# Altium PCB PCB1.PcbDoc
Units mil, origin at the board's own origin, x right, y up, seen from the top; angles counter-clockwise.
Board outline 1880 x 1065 mil, 2 copper layers (Top Layer, Bottom Layer); 16 components, 8 nets, 37 pads, 38 vias.
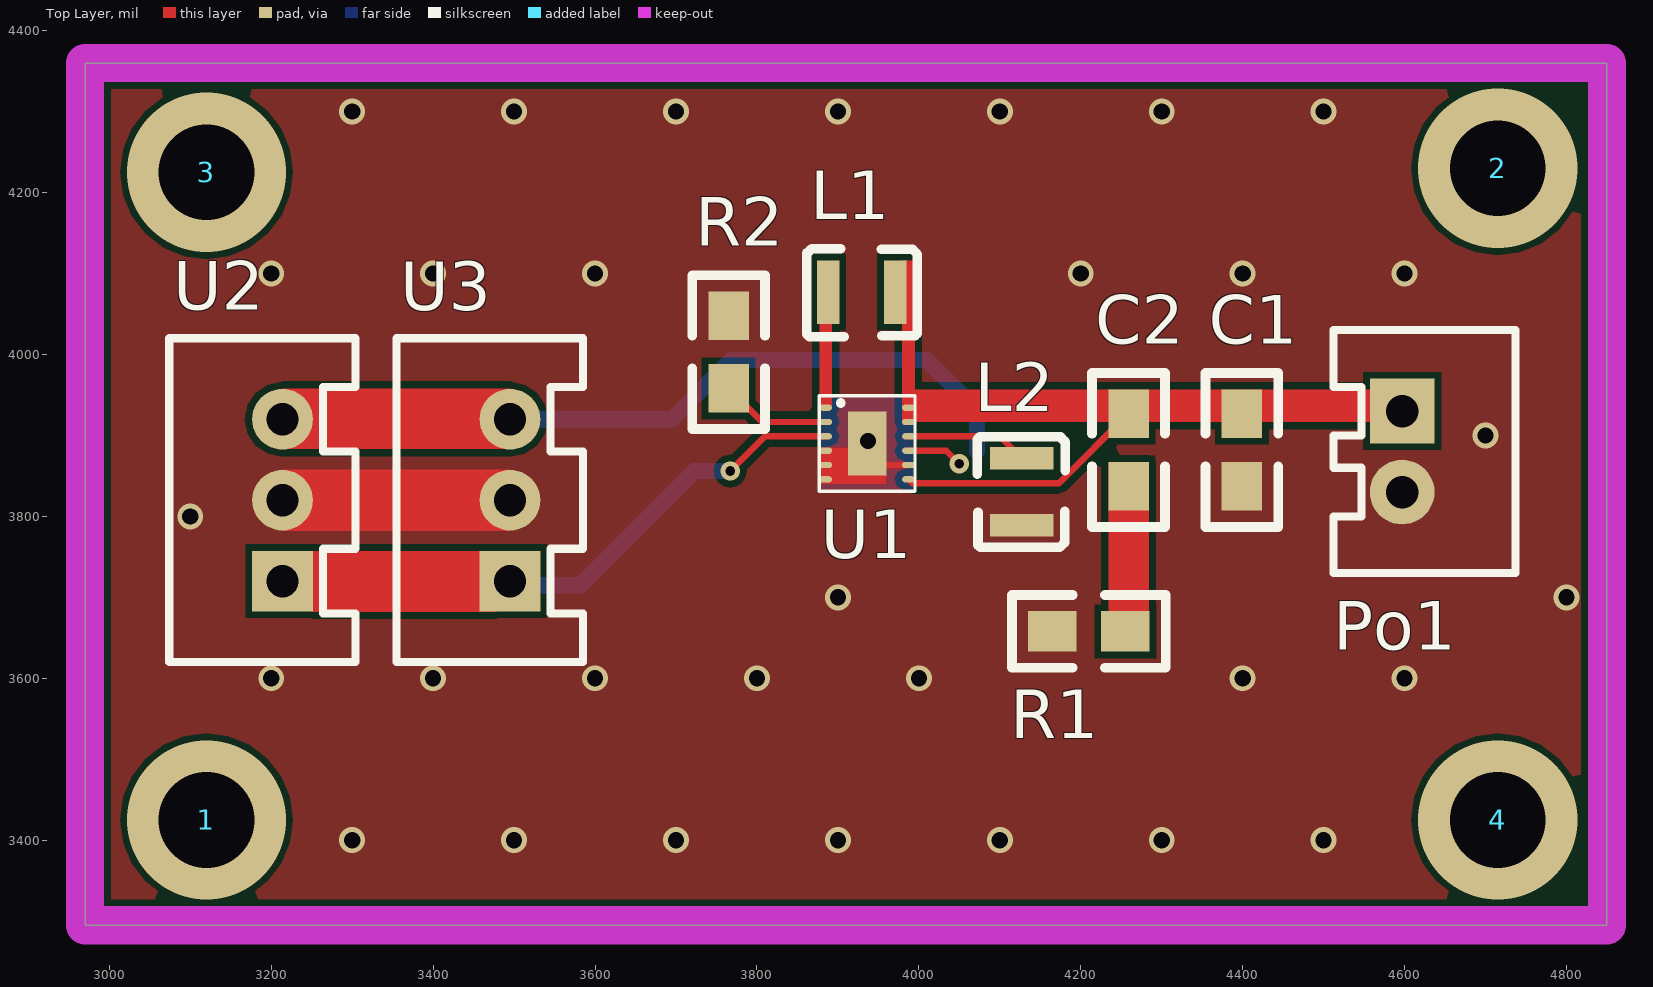
[diagram p0: Top Layer view]
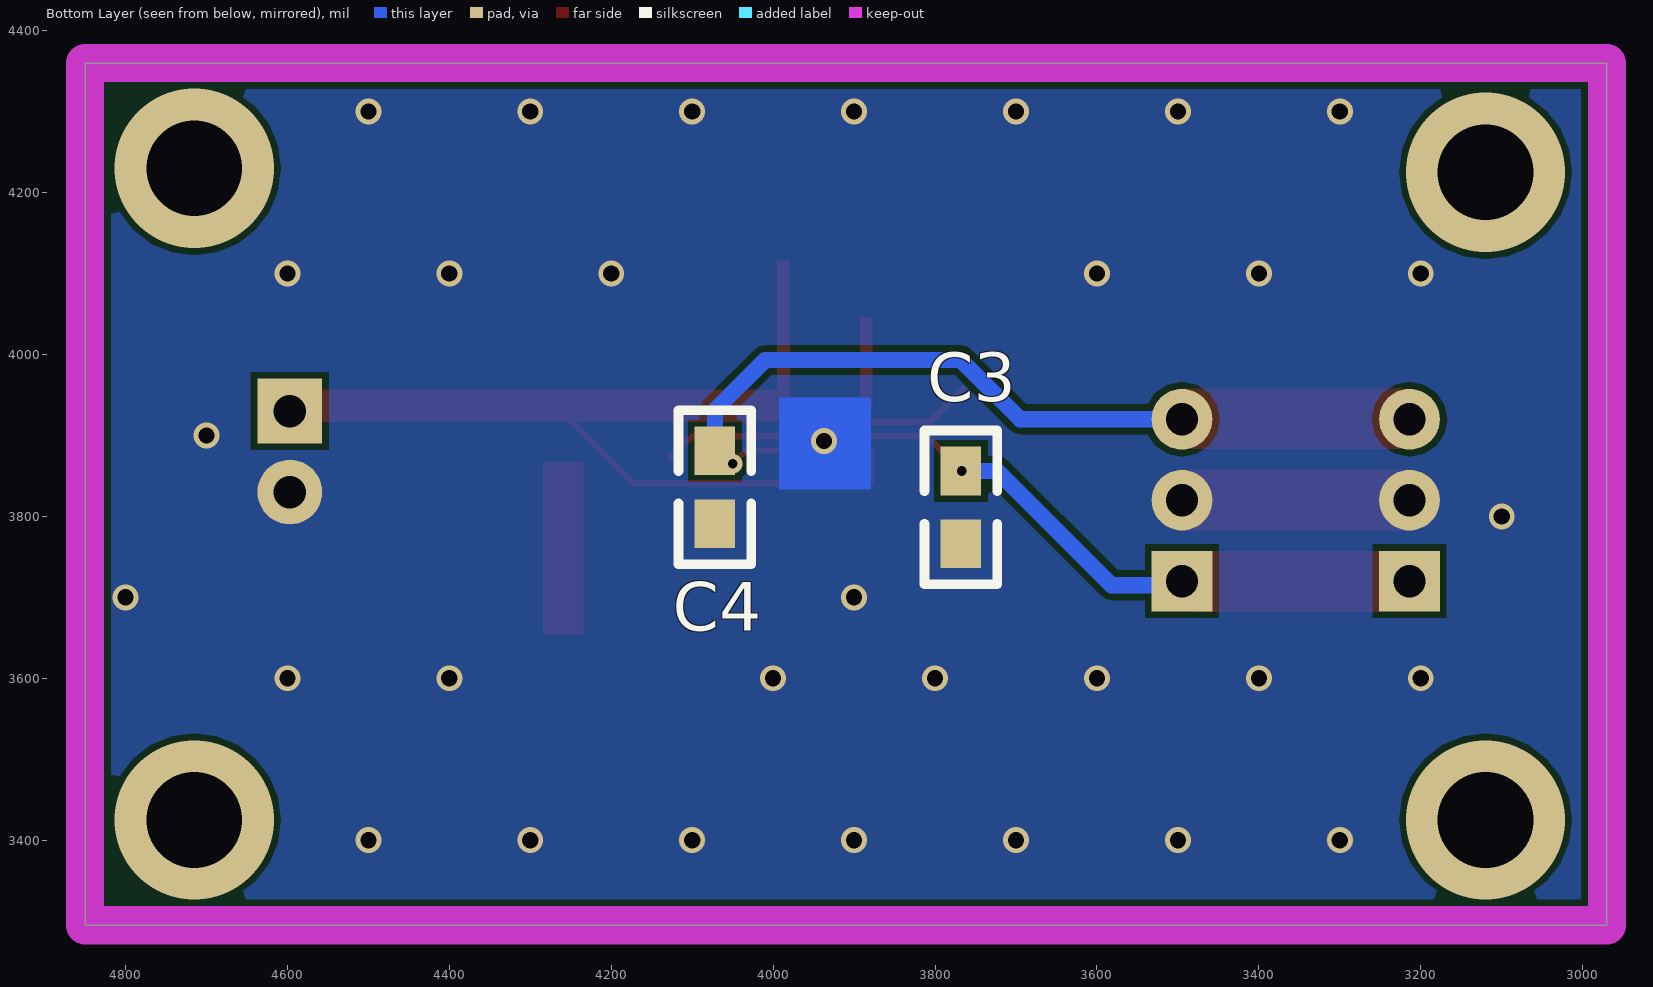
[diagram p1: Bottom Layer view, seen from below]

## Layer stack, top to bottom
Top Solder: solder mask 0.4, Solder Resist, Dk 3.5
Top Layer: signal copper 1.4
Dielectric 1: dielectric 12.6, FR-4, Dk 4.8
Bottom Layer: signal copper 1.4
Bottom Solder: solder mask 0.4, Solder Resist, Dk 3.5

## Board outline
2970,3295 4850,3295 4850,4360 2970,4360

## Design rules (kind name [scope] priority, off if disabled: settings)
Clearance [All] p1: gap=8
PlaneConnect [All] p1: planeconnectstyle=Direct reliefexpansion=20 reliefentries=4 reliefconductorwidth=10 reliefairgap=10
PolygonConnect [All] p1: connectstyle=Direct reliefconductorwidth=10 reliefentries=4 polygonreliefangle="90 Angle" airgapwidth=30
RoutingVias [All] p1: holewidth=12 width=24 viastyle="Through Hole" minholewidth=12 minwidth=24 maxholewidth=300 maxwidth=300
SolderMaskExpansion [All] p1: expansion=4
Width [All] p1: maxlimit=50 minlimit=8 preferedwidth=10
29 further rules are at their usual default settings.

## Components (designator, comment, footprint, x,y, rotation, side; value= is the part's Value field where it differs from the comment)
1 "螺丝孔" 固定过孔 3120,3425 r90 top
2 "螺丝孔" 固定过孔 4715,4230 r90 top
3 "螺丝孔" 固定过孔 3120,4225 r90 top
4 "螺丝孔" 固定过孔 4715,3425 r90 top
C1 "Cap1" 0805 4399,3837 r90 top
C2 "Cap1" 0805 4259,3837 r90 top
C3 "Cap1" 0805 3768,3766 r90 bottom
C4 "Cap1" 0805 4072,3791 r90 bottom
L1 "4.7UH" 2520 3874.22,4116.37 r0 top
L2 "4.7uH" 2520 4166.37,3885.46 r270 top
Po1 "Power_2Port" Power_S_2Port 4597,3930 r270 top
R1 "RES" 0805 4165,3658 r0 top
R2 "RES" 0805 3765,4048 r270 top
U1 "TPS65133" "QFN-12 3X3" 3876.94,3830.94 r90 top
U2 "XH2.54-3p" XH2.54-3p 3214,3720 r90 top
U3 "XH2.54-3p" XH2.54-3p 3495,3720 r90 top

## Footprints (in the part's own frame and the unit in brackets; to place one, negate y for a bottom-side part, rotate by r counter-clockwise, add the part's x,y. Pads: shape width x height; smd on the part's side, far side on the other; paste and mask are expansions set on the pad)
0805 [mil]
  rect 60x50 smd: 1(0,0) 2(90,0)
  silkscreen extent -50,-45 140,45
2520 [mm]
  rect 0.7x2 smd: 1(0.35,-1) 2(2.45,-1)
  silkscreen extent -0.33,-2.4 3.15,0.37
Power_S_2Port [mil]
  rect 80x80 hole 40: 1(0,0)
  round 80 hole 40: 2(100,0)
  silkscreen extent -100,-85 200,140
"QFN-12 3X3" [mm]
  rect 2.02x1.21 smd: 0(1.5,-1.5)
  oval 0.2x0.4 smd: 1(2.625,-0.2) 2(2.175,-0.2) 3(1.725,-0.2) 4(1.275,-0.2) 5(0.825,-0.2) 6(0.375,-0.2) 7(0.375,-2.8) 8(0.825,-2.8) 9(1.275,-2.8) 10(1.725,-2.8) 11(2.175,-2.8) 12(2.625,-2.8)
  silkscreen extent 0,-3 3,0
XH2.54-3p [mil]
  rect 75x75 hole 40: 1(0,0)
  round 75 hole 40: 2(100,0) 3(200,0)
  silkscreen extent -100,-90 300,140
固定过孔 [mil]

## Part data
L1 L2: library part "IND DFE252012C"

## Via types
v1: diameter 32, hole 20, Top Layer to Bottom Layer, 32 vias
v2: diameter 196.85, hole 118.11, Top Layer to Bottom Layer, 4 vias
v3: diameter 24, hole 12, Top Layer to Bottom Layer, 2 vias

## Nets (pads, with @x,y where several pads share a name; then routed paths per layer and width w, separated by ;. In a path a pad name is that pad's centre, name@x,y a point inside that pad or via, vN(x,y) a via of type N, cw(c..) or ccw(c..) an arc to the next point about the centre after c; other vN are vias at no path point)
AGND: C2.1 R1.2
GND: C1.1 C3.1 C4.1 L2.2 Po1.2 R1.1 R2.1 U1.0 U1.4 U1.5 U1.6 U1.8 U2.2 U3.2 | length 102.4
  Top Layer w8: U1.5 U1.8
  other v1: 3300,3400 3500,3400 3700,3400 3900,3400 4100,3400 4300,3400 4500,3400 3200,3600 3400,3600 3600,3600 3800,3600 4000,3600 4400,3600 4600,3600 3900,3700 4800,3700 3100,3800 3937,3893 4700,3900 3200,4100 3400,4100 3600,4100 4200,4100 4400,4100 4600,4100 3300,4300 3500,4300 3700,4300 3900,4300 4100,4300 4300,4300 4500,4300
NetC1_2: C1.2 C2.2 L1.2 Po1.1 U1.7 U1.11 U1.12 | length 309.4
  Top Layer w8: U1.7 3991.89,3841 4173,3841 C2.2
NetC3_2: C3.2 U1.3 U2.1 U3.1 | length 465
  Top Layer w8: v3(3767,3856) 3809.86,3898.86 U1.3
  Bottom Layer w20: U3.1@3496,3715 3582,3715 3723,3856 v3(3767,3856)
NetC4_2: C4.2 U1.9 U2.3 U3.3 | length 752.4
  Top Layer w8: U1.9 4033.86,3881.14 v3(4050,3865)
  Bottom Layer w20: U3.3 3695,3920 3768,3993 4010,3993 4072,3931 C4.2
NetL1_1: L1.1 U1.1
NetL2_1: L2.1 U1.10 | length 151.1
  Top Layer w8: U1.10 4099.82,3898.86 L2.1
PGND: R2.2 U1.2 | length 137
  Top Layer w8: R2.2 3806.43,3916.57 U1.2
copper on no net:
  other v2: 3120,3425 4715,3425 3120,4225 4715,4230

## Polygon pours and split planes (outlines as drawn)
GND on Top Layer "Top Layer-No Net" (solid, pour order 0): 2970,4360 2970,3295 4850,3295 4850,4360
GND on Bottom Layer "Top Layer-No Net" (solid, pour order 2): 4850,4360 2970,4360 2970,3295 4850,3295

## Keep-outs
Keep-Out Layer:
  the board outline again, w47.24

## Other copper
Top Layer:
  rectangle net AGND: 4234,3654 4284,3867
  rectangle net NetL1_1: 3877,3934 3893,4046
  rectangle net NetC1_2: 3979,3916.57 3995,4116
  rectangle net GND: 3876,3840 3960,3885
  rectangle net NetC1_2: 3995,3916.57 4608,3957
  rectangle net NetC3_2: 3251,3682 3478,3757
  rectangle net GND: 3214,3782 3495,3858
  rectangle net NetC4_2: 3214,3883 3496,3958
Bottom Layer:
  rectangle net GND: 3879,3833 3993,3947

## Silkscreen, mask and mechanical layers (free items; w line width, h text height)
Bottom Solder:
  rectangle: 3879,3833 3993,3947